# Altium PCB 4_layer.PcbDoc (part 2 of 2)
Units mm, origin at the board's own origin, x right, y up, seen from the top; angles counter-clockwise.
Board outline 78.3 x 43.68 mm, 4 copper layers (Top Layer, GND, PWR, Bottom Layer), stack 1.795 mm thick; 72 components, 60 nets, 280 pads, 137 vias.
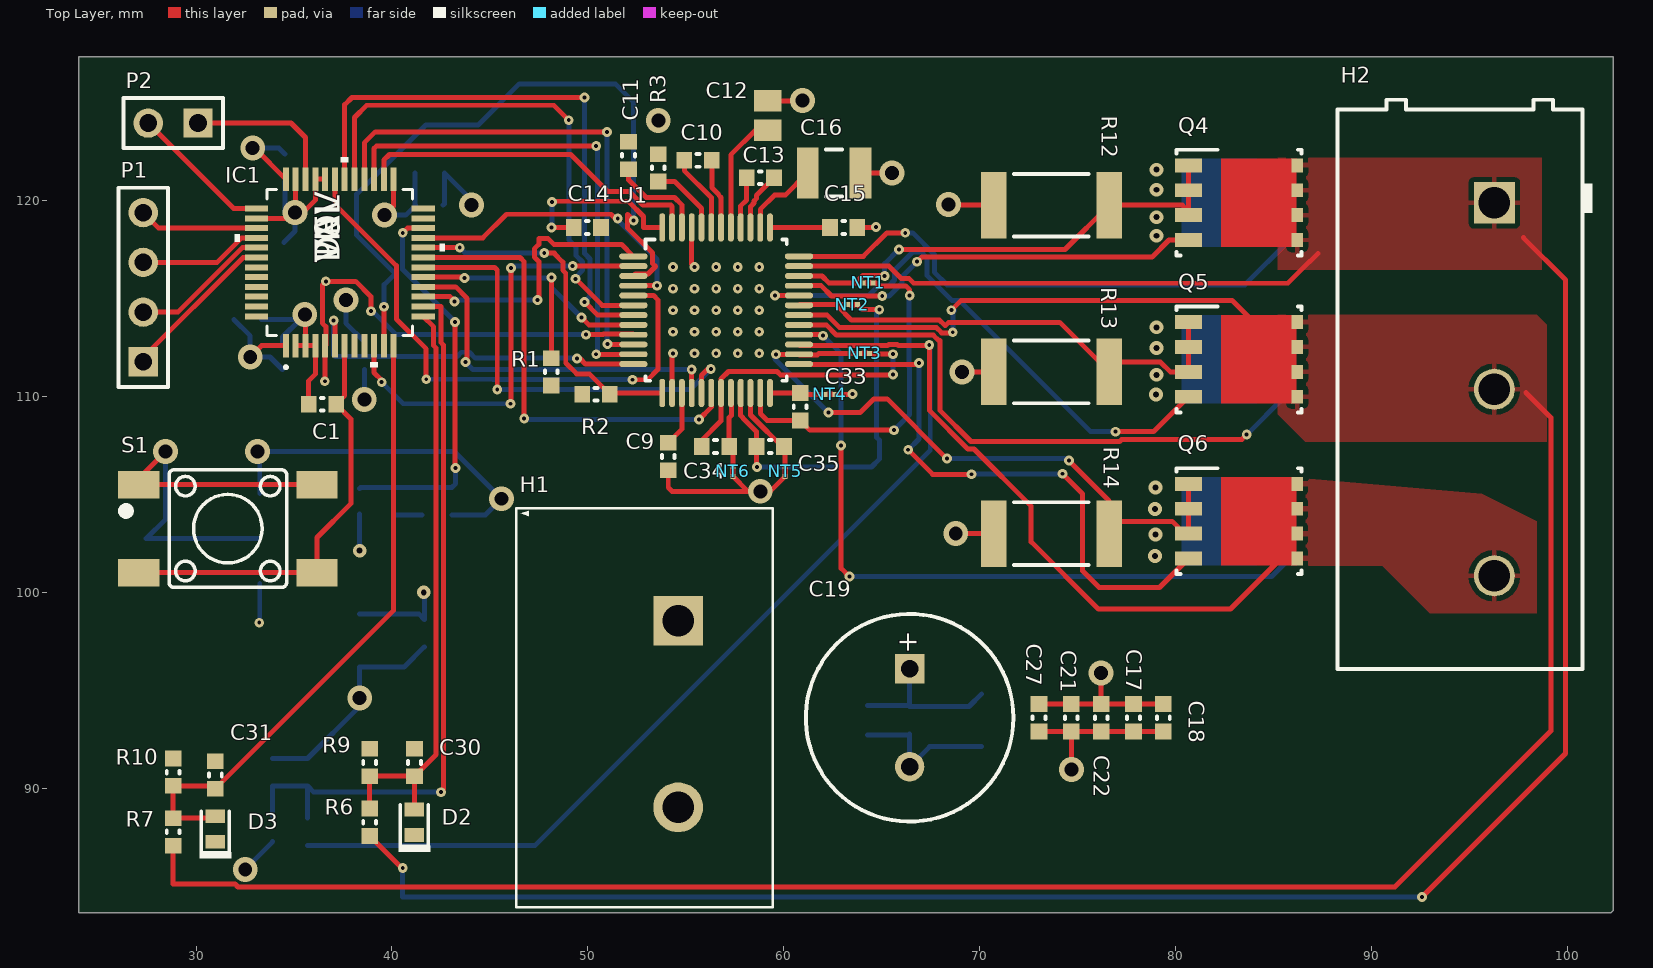
[diagram p0: Top Layer view]

## Polygon pours and split planes (outlines as drawn) (continued)
GND on GND (split plane): 102.223,83.792 102.183,83.752 24.127,83.752 24.127,83.822 24.151,83.818 44.577,83.818 44.627,83.827 44.669,83.855 44.697,83.897 44.706,83.947 44.706,109.22 44.697,109.27 44.669,109.312 44.627,109.34 44.577,109.349 44.527,109.34 44.485,109.312 44.457,109.27 44.448,109.22 44.448,84.076 25.574,84.076 25.552,84.092 25.502,84.102 25.452,84.092 25.43,84.076 24.151,84.076 24.127,84.072 24.127,127.223 44.448,127.223 44.448,121.158 44.457,121.108 44.485,121.066 44.527,121.038 44.577,121.029 44.627,121.038 44.669,121.066 44.697,121.108 44.706,121.158 44.706,127.223 102.223,127.223
VDD on PWR (split plane): 44.39,84.134 25.527,84.134 25.479,84.127 25.435,84.109 25.395,84.126 25.347,84.132 24.172,84.132 24.127,84.126 24.127,127.223 44.39,127.223
PVDD on PWR (split plane): 102.223,83.792 102.183,83.752 24.127,83.752 24.127,83.765 24.172,83.759 25.347,83.759 25.395,83.765 25.439,83.783 25.479,83.767 25.527,83.76 44.577,83.76 44.625,83.767 44.67,83.785 44.709,83.815 44.739,83.854 44.757,83.899 44.764,83.947 44.757,83.995 44.739,84.04 44.757,84.085 44.764,84.134 44.764,127.223 102.223,127.223

## Other copper
GND (plane layer: these items are gaps in the copper):
  lines w0.254: 24.151,83.947 25.527,83.947 ; 25.502,83.972 25.527,83.947 ; 44.577,109.22 44.577,83.947 25.527,83.947 ; 44.577,121.158 44.577,127.223
PWR (plane layer: these items are gaps in the copper):
  lines w0.37: 24.172,83.945 25.347,83.945 ; 25.527,83.947 30.29,83.947 39.814,83.947 44.577,83.947 ; 44.577,84.134 44.577,127.25

## Text inside footprints (layer, text, board x,y; h text height)
C19: Mechanical 5 "+" at 65.913,98.044 h1.02 r270; Top Overlay "+" at 65.913,98.044 h1.02 r270
IC1: Top Overlay "TOL" at 37.338,116.84 h1.27 r90; Top Overlay "VAL" at 37.338,116.84 h1.27 r90; Top Overlay "DEV" at 37.338,116.84 h1.27 r90; Top Overlay "PN" at 37.338,116.84 h1.27 r90; Multi-Layer "Copyright (C) 2016 Accelerated Designs. All rights reserved" at 37.338,116.84 h0.03 r90; Mechanical 13 "RefDes2" at 37.338,116.84 h1.27 r90